# EAGLE board TC board (EAGLE 6.3)
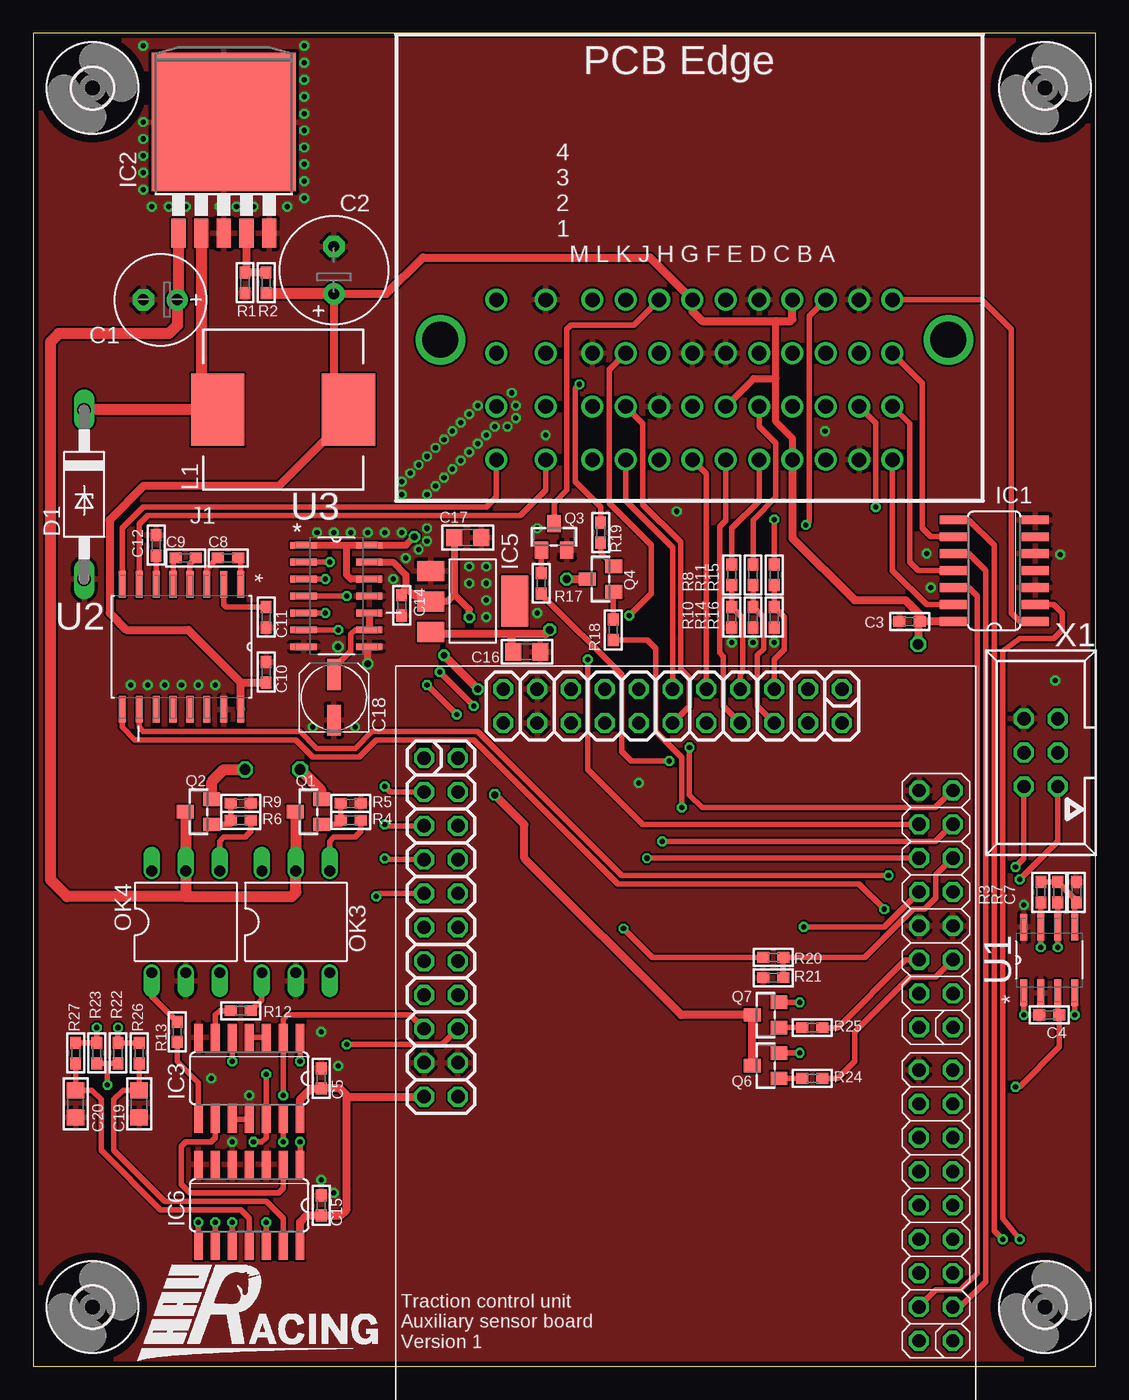
[diagram p0: board, top side]
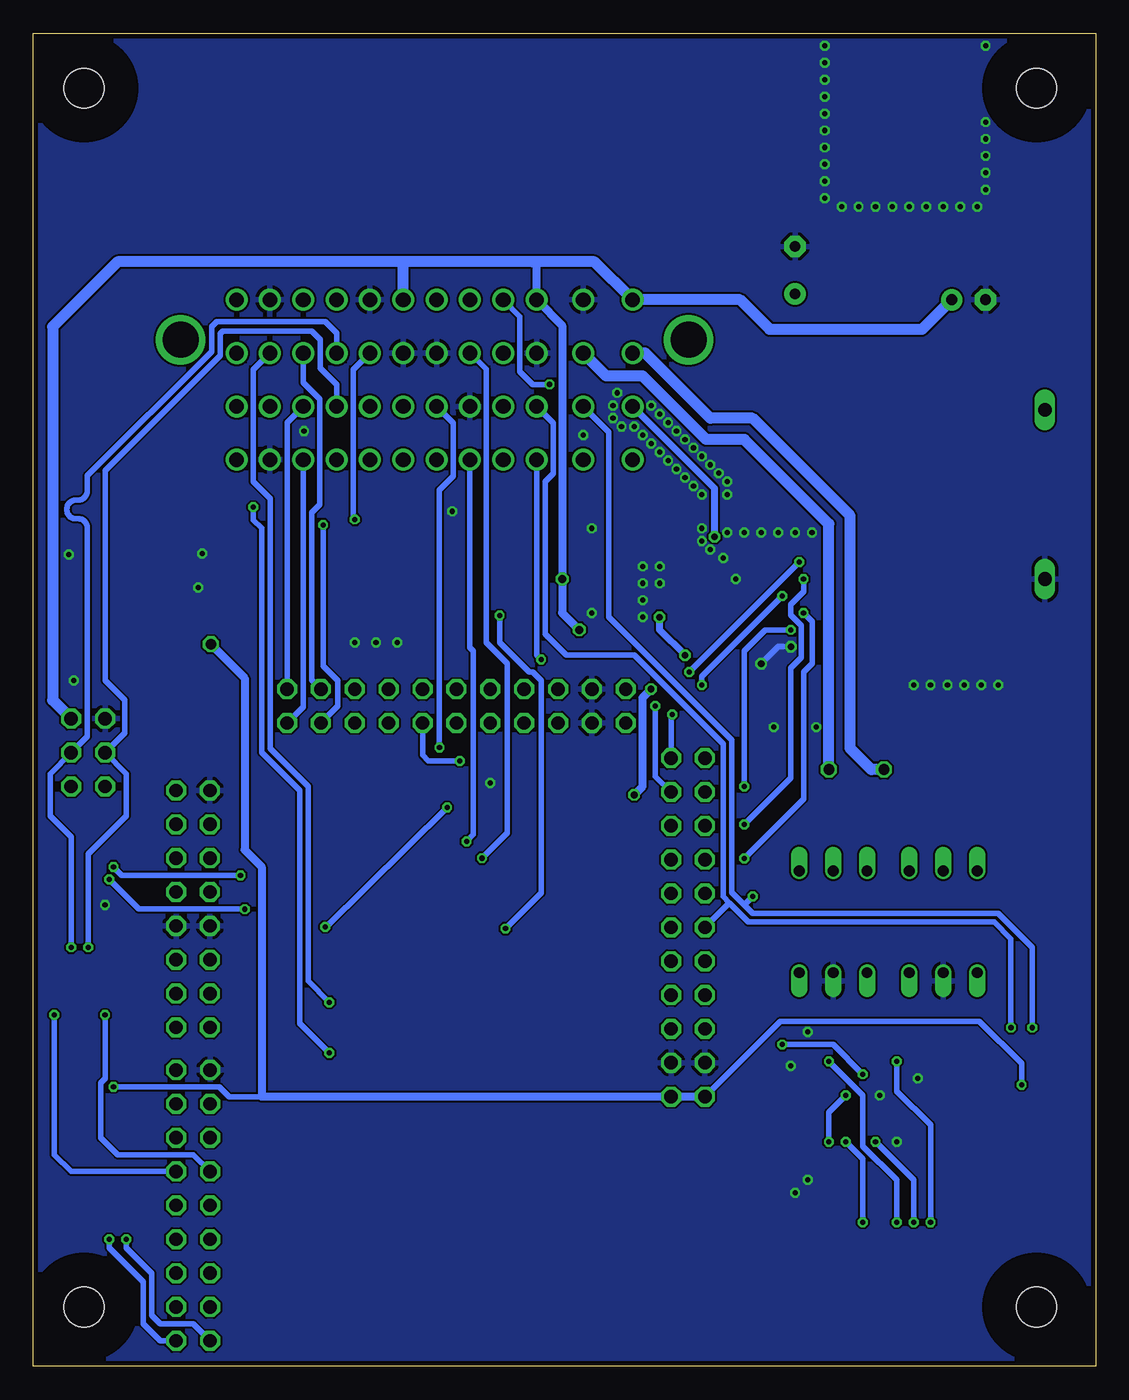
[diagram p1: board, bottom side, seen from below]

Size 79.67 x 100 mm. Coordinates in mm from the lower left corner, seen from the top.
Outline: 0,0 79.67,0 79.67,100 0,100 0,0
Copper layers (1*16): Top 0.0356mm / dielectric 1.5011mm / Bottom 0.0356mm
Design rules "LaenPCBOrder": minimum track width 6mil, minimum drill 13mil, track to track 6mil, track to pad 6mil, pad to pad 6mil, via to via 6mil, smd to smd 6mil, copper to edge 15mil, drill to drill 6mil, minimum pad ring 7mil, minimum via ring 7mil, stop-mask expansion 3mil, vias tented up to drill 0mil, thermal gap 10mil

## Footprints (pad centres in the part's own frame; a part is rotated, then mirrored left to right if it is on the bottom)
E2,5-7 = drill 0.813 pad 1.6: + -1.27,0 | drill 0.813 pad 1.6 octagon: - 1.27,0
E3,5-8 = drill 0.813 pad 1.6: + -1.778,0 | drill 0.813 pad 1.6 octagon: - 1.778,0
_0603 = smd 0.9 x 0.8: 1 -0.762,0; 2 0.762,0
_0805 = smd 1.2 x 1.3: 1 -1.016,0; 2 1.016,0
UD-5X5,8_NICHICON = smd 2.3 x 1: + 1.725,0; - -1.7,0
F126Z12 = drill 1.016 long: A 6.35,0; C -6.35,0
3,0 = hole 3: 0,0
SO14 = smd 0.66 x 2.032: 1 -3.81,-3.073; 2 -2.54,-3.073; 3 -1.27,-3.073; 4 0,-3.073; 5 1.27,-3.073; 6 2.54,-3.073; 7 3.81,-3.073; 8 3.81,3.073; 9 2.54,3.073; 10 1.27,3.073; 11 0,3.073; 12 -1.27,3.073; 13 -2.54,3.073; 14 -3.81,3.073
TO263-5 = smd 1.067 x 2.159: 1 -3.404,-5.791; 2 -1.702,-5.791; 3 0,-5.791; 4 1.702,-5.791; 5 3.404,-5.791 | smd 10.8 x 10.41: 6 0,2.54
SOT223 = smd 1.499 x 2.007: 1 -2.261,-3.15; 2 0.025,-3.15; 3 2.311,-3.15 | smd 3.81 x 2.007: 4 0,3.15
AUTOCONNECTOR = drill 1.1: A1 15.22,-6.92; A2 15.22,-2.92; A3 15.22,1.08; A4 15.22,5.08; B1 12.72,-6.92; B2 12.72,-2.92; B3 12.72,1.08; B4 12.72,5.08; C1 10.22,-6.92; C2 10.22,-2.92; C3 10.22,1.08; C4 10.22,5.08; D1 7.72,-6.92; D2 7.72,-2.92; D3 7.72,1.08; D4 7.72,5.08; E1 5.22,-6.92; E2 5.22,-2.92; E3 5.22,1.08; E4 5.22,5.08; F1 2.72,-6.92; F2 2.72,-2.92; F3 2.72,1.08; F4 2.72,5.08; G1 0.22,-6.92; G2 0.22,-2.92; G3 0.22,1.08; G4 0.22,5.08; H1 -2.28,-6.92; H2 -2.28,-2.92; H3 -2.28,1.08; H4 -2.28,5.08; J1 -4.78,-6.92; J2 -4.78,-2.92; J3 -4.78,1.08; J4 -4.78,5.08; K1 -7.28,-6.92; K2 -7.28,-2.92; K3 -7.28,1.08; K4 -7.28,5.08; L1 -10.78,-6.92; L2 -10.78,-2.92; L3 -10.78,1.08; L4 -10.78,5.08; M1 -14.48,-6.92; M2 -14.48,-2.92; M3 -14.48,1.08; M4 -14.48,5.08 | drill 2.7: SHIELD1 19.42,2.08; SHIELD2 -18.68,2.08
CDRH125 = smd 5.4 x 4: 1 0,4.9; 2 0,-4.9
DIL06 = drill 0.813 offset: 1 -2.54,-3.81; 2 0,-3.81; 3 2.54,-3.81; 4 2.54,3.81; 5 0,3.81; 6 -2.54,3.81
SOT23-WIDE = smd 1 x 1.27: 1 -0.95,-1; 2 0.95,-1; 3 0,1
SOIC127P600X175-8N = smd 1.981 x 0.533: 1 -2.464,1.905; 2 -2.464,0.635; 3 -2.464,-0.635; 4 -2.464,-1.905; 5 2.464,-1.905; 6 2.464,-0.635; 7 2.464,0.635; 8 2.464,1.905
SOIC127P1032X265-16N = smd 1.981 x 0.533: 1 -4.699,4.445; 2 -4.699,3.175; 3 -4.699,1.905; 4 -4.699,0.635; 5 -4.699,-0.635; 6 -4.699,-1.905; 7 -4.699,-3.175; 8 -4.699,-4.445; 9 4.699,-4.445; 10 4.699,-3.175; 11 4.699,-1.905; 12 4.699,-0.635; 13 4.699,0.635; 14 4.699,1.905; 15 4.699,3.175; 16 4.699,4.445
SOIC127P600X175-14N = smd 1.981 x 0.508: 1 -2.464,3.81; 2 -2.464,2.54; 3 -2.464,1.27; 4 -2.464,0; 5 -2.464,-1.27; 6 -2.464,-2.54; 7 -2.464,-3.81; 8 2.464,-3.81; 9 2.464,-2.54; 10 2.464,-1.27; 11 2.464,0; 12 2.464,1.27; 13 2.464,2.54; 14 2.464,3.81
CPU-BOARD-JP1 = drill 1 octagon: P$1 1.27,-12.7; P$2 -1.27,-12.7; P$3 1.27,-10.16; P$4 -1.27,-10.16; P$5 1.27,-7.62; P$6 -1.27,-7.62; P$7 1.27,-5.08; P$8 -1.27,-5.08; P$9 1.27,-2.54; P$10 -1.27,-2.54; P$11 1.27,0; P$12 -1.27,0; P$13 1.27,2.54; P$14 -1.27,2.54; P$15 1.27,5.08; P$16 -1.27,5.08; P$17 1.27,7.62; P$18 -1.27,7.62; P$19 1.27,10.16; P$20 -1.27,10.16; P$21 1.27,12.7; P$22 -1.27,12.7; P$23 -3.905,18.637; P$24 -3.905,16.097; P$25 -6.445,18.637; P$26 -6.445,16.097; P$27 -8.985,18.637; P$28 -8.985,16.097; P$29 -11.525,18.637; P$30 -11.525,16.097; P$31 -14.065,18.637; P$32 -14.065,16.097; P$33 -16.605,18.637; P$34 -16.605,16.097; P$35 -19.145,18.637; P$36 -19.145,16.097; P$37 -21.685,18.637; P$38 -21.685,16.097; P$39 -24.225,18.637; P$40 -24.225,16.097; P$41 -26.765,18.637; P$42 -26.765,16.097; P$43 -29.305,18.637; P$44 -29.305,16.097; P$45 -47.625,-21.018; P$46 -47.625,-18.479; P$47 -45.085,-21.018; P$48 -45.085,-18.479; P$49 -42.545,-21.018; P$50 -42.545,-18.479; P$51 -40.005,-21.018; P$52 -40.005,-18.479; P$53 -37.465,-21.018; P$54 -37.465,-18.479; P$55 -34.925,-21.018; P$56 -34.925,-18.479; P$57 -32.385,-21.018; P$58 -32.385,-18.479; P$59 -29.845,-21.018; P$60 -29.845,-18.479; P$61 -27.305,-21.018; P$62 -27.305,-18.479; P$63 -24.115,-21.024; P$64 -24.115,-18.484; P$65 -21.575,-21.024; P$66 -21.575,-18.484; P$67 -19.035,-21.024; P$68 -19.035,-18.484; P$69 -16.495,-21.024; P$70 -16.495,-18.484; P$71 -13.955,-21.024; P$72 -13.955,-18.484; P$73 -11.415,-21.024; P$74 -11.415,-18.484; P$75 -8.875,-21.024; P$76 -8.875,-18.484; P$77 -6.335,-21.024; P$78 -6.335,-18.484
057-006-1 = drill 1 octagon: 1 -2.54,-1.27; 2 -2.54,1.27; 3 0,-1.27; 4 0,1.27; 5 2.54,-1.27; 6 2.54,1.27

## Placement (x,y rotation side)
C1  100u  [E2,5-7]  9.52,80.01 180 top
C2  220uf  [E3,5-8]  22.54,82.23 90 top
C3  100n  [_0603]  65.72,55.88 180 top
C4  100n  [_0603]  76.2,26.35 180 top
C5  100n  [_0603]  21.59,21.59 90 top
C7  4n7  [_0603]  78.23,35.56 90 top
C8  100n  [_0603]  14.6,60.64 180 top
C9  100n  [_0603]  11.43,60.64 180 top
C10  100n  [_0603]  17.46,52.07 270 top
C11  100n  [_0603]  17.46,56.2 270 top
C12  100n  [_0603]  9.21,61.59 270 top
C14  100n  [_0603]  27.62,57.09 270 top
C15  100n  [_0603]  21.59,12.07 90 top
C16  10u  [_0805]  37.02,53.59 180 top
C17  22u  [_0805]  32.58,62.17 180 top
C18  33uf pan FC  [UD-5X5,8_NICHICON]  22.54,50.17 90 top
C19  100n  [_0805]  7.94,19.68 90 top
C20  100n  [_0805]  3.17,19.68 90 top
D1  1n5824  [F126Z12]  3.81,65.41 270 top
H1  MOUNT-HOLE3.0  [3,0]  75.88,95.89 0 top
H2  MOUNT-HOLE3.0  [3,0]  4.44,95.89 0 top
H3  MOUNT-HOLE3.0  [3,0]  4.44,4.45 0 top
H4  MOUNT-HOLE3.0  [3,0]  75.88,4.45 0 top
IC1  74HC14D  [SO14]  72.07,59.69 90 top
IC2  lm2575  [TO263-5]  14.29,90.81 0 top
IC3  74AC08D  [SO14]  16.19,21.59 180 top
IC5  REG1117  [SOT223]  32.96,57.4 270 top
IC6  74AC14D  [SO14]  16.19,12.07 180 top
J1  CON1  [AUTOCONNECTOR]  49.21,74.93 0 top
L1  MSS1278-224KLD  [CDRH125]  18.73,71.76 90 top
OK3  4N37  [DIL06]  19.69,33.34 0 top
OK4  4N37  [DIL06]  11.43,33.34 0 top
Q1  [SOT23-WIDE]  20.64,41.59 90 top
Q2  [SOT23-WIDE]  12.38,41.59 90 top
Q3  [SOT23-WIDE]  39.05,62.23 0 top
Q4  [SOT23-WIDE]  42.54,59.06 90 top
Q6  [SOT23-WIDE]  54.93,22.54 90 top
Q7  [SOT23-WIDE]  54.93,26.35 90 top
R1  1k  [_0603]  15.88,81.28 90 top
R2  1k69  [_0603]  17.46,81.28 90 top
R3  60  [_0603]  75.56,35.56 90 top
R4  200  [_0603]  23.81,40.96 0 top
R5  1000  [_0603]  23.81,42.23 0 top
R6  200  [_0603]  15.56,40.96 0 top
R7  60  [_0603]  76.83,35.56 90 top
R8  604  [_0603]  52.39,59.37 90 top
R9  1000  [_0603]  15.56,42.23 0 top
R10  178  [_0603]  52.39,56.2 90 top
R11  604  [_0603]  53.97,59.37 90 top
R12  200  [_0603]  15.56,26.67 180 top
R13  200  [_0603]  10.79,25.08 270 top
R14  178  [_0603]  53.97,56.2 90 top
R15  604  [_0603]  55.56,59.37 90 top
R16  178  [_0603]  55.56,56.2 90 top
R17  500  [_0603]  38.1,58.74 270 top
R18  500  [_0603]  43.5,55.25 270 top
R19  100k  [_0603]  42.54,62.55 90 top
R20  178  [_0603]  55.5,29.15 0 top
R21  604  [_0603]  55.5,30.67 180 top
R22  500  [_0603]  6.35,23.5 270 top
R23  500  [_0603]  4.76,23.5 270 top
R24  500  [_0603]  58.42,21.59 0 top
R25  500  [_0603]  58.42,25.4 0 top
R26  500  [_0603]  7.94,23.5 270 top
R27  500  [_0603]  3.17,23.5 270 top
U1  MAX13052ESA+  [SOIC127P600X175-8N]  76.2,30.48 90 top
U2  MAX232AEWE+  [SOIC127P1032X265-16N]  11.11,53.98 270 top
U3  MAX531AESD+  [SOIC127P600X175-14N]  22.73,57.79 0 top
U$1  CPU-BOARD  [CPU-BOARD-JP1]  47.94,49.53 90 top
X1  057-006-1  [057-006-1]  75.56,46.04 90 top

## Library data of the parts
C1 C2 C18 = rcl
C3-C5 C7-C12 C14-C17 C19 C20 Q1-Q4 Q6 Q7 R1-R27 = microbuilder
D1 = diode
H1-H4 = holes
IC1 IC3 IC6 = 74xx-eu
IC2 = linear
IC5 = burr-brown; MPN: REG1117; OC_FARNELL: 1097566; OC_NEWARK: 14P6981
J1 U$1 = unicorn_v2
L1 = SparkFun-Passives
OK3 OK4 = optocoupler; MF: FAIRCHILD SEMICONDUCTOR; MPN: 4N37; OC_FARNELL: 1612456; OC_NEWARK: 72K9948
U1 = Maxim_By_element14_Batch_1; MPN: MAX13052ESA+; OC_FARNELL: 1600112; OC_NEWARK: 99K2875; PACKAGE: SOIC-8; SUPPLIER: Maxim
U2 = Maxim_By_element14_Batch_1; MPN: MAX232AEWE+; OC_FARNELL: 9724400; OC_NEWARK: 67K4435; PACKAGE: SOIC-16; SUPPLIER: Maxim
U3 = Maxim_By_element14_Batch_1; MPN: MAX531AESD+; OC_FARNELL: -; OC_NEWARK: 23K6158; PACKAGE: SOIC-14; SUPPLIER: Maxim
X1 = con-panduit; OC_FARNELL: unknown; OC_NEWARK: unknown

## Nets
3.3V: C2.+ C3.1 C4.1 C5.1 C10.2 C15.1 IC1.14 IC3.14 IC6.14 J1.D1 J1.D4 J1.F2 J1.G4 L1.2 R2.1 R22.2 R23.2 U1.3 U2.16 U$1.P$43 U$1.P$44
5.0V: C14.1 C17.2 IC5.2 Q6.3 Q7.3 U3.13
12V: C1.+ C16.2 IC2.1 IC5.3 J1.F4 J1.K4 J1.M4 OK3.5 OK4.5 Q1.3 Q2.3 Q4.3 X1.5
BITE: J1.E3 R15.2
BITEO: R15.1 R16.2 U$1.P$5
BRAKE-POT: J1.F1 U$1.P$8
BRAKEP: J1.K1 U$1.P$76
CAN_RX: U1.4 U$1.P$55
CAN_TX: U1.1 U$1.P$56
CANH: J1.D3 R7.1 U1.6 X1.3
CANL: J1.D2 R3.1 U1.7 X1.4
CLUTCH-POT: J1.G1 U$1.P$9
COMRX: U2.9 X1.1
COMTX: U2.10 X1.2
DACCLR: U3.3 U$1.P$27
DACCS: U3.5 U$1.P$29
DIRA: IC3.2 IC6.1 U$1.P$39
DIRAO: J1.L3 Q1.2
DIRASENSE: J1.L2 R23.1 R27.1 U$1.P$31
DIRB: IC3.12 IC6.9 U$1.P$40
DIRBO: J1.M3 Q2.2
DIRBSENSE: J1.K2 R22.1 R26.1 U$1.P$33
ECU1: J1.B2 Q6.2
ECU1L: R24.2 U$1.P$67
ECU2: J1.B3 Q7.2
ECU2L: R25.2 U$1.P$68
FUEL-RECIEVE: J1.J3 R21.2
FUEL-RECIEVEI: R20.2 R21.1 U$1.P$73
FUEL-SEND: R18.2 U$1.P$72
FUEL-SENDO: Q4.2 R19.1
GND: C1.- C2.- C3.2 C4.2 C5.2 C7.2 C10.1 C11.2 C12.1 C14.2 C15.2 C16.1 C17.1 C18.- C19.1 C20.1 D1.A IC1.3 IC1.5 IC1.7 IC2.3 IC2.5 IC2.6 IC3.7 IC5.1 IC6.3 IC6.5 IC6.7 J1.B1 J1.B4 J1.E4 J1.F3 J1.G3 J1.H2 J1.K3 J1.L4 OK3.2 OK4.2 Q3.2 R1.1 R5.2 R9.2 R10.1 R14.1 R16.1 R20.1 U1.2 U1.8 U2.15 U3.7 U3.8 U3.11 U$1.P$19 U$1.P$20 U$1.P$41 U$1.P$42 U$1.P$62 U$1.P$69 U$1.P$70 U$1.P$78 X1.6
GSENS: J1.E1 R8.2
GSENSO: R8.1 R10.2 U$1.P$7
IGNCUT: R17.2 U$1.P$10
IGNCUTO: J1.H4 Q3.3
MISO: U3.6 U$1.P$25
MOSI: U3.2 U$1.P$26
N$1: IC2.4 R1.2 R2.2
N$2: D1.C IC2.2 L1.1
N$3: IC1.9 J1.A3
N$4: IC1.13 J1.A1
N$5: IC1.1 J1.A4
N$6: IC1.11 J1.A2
N$7: OK3.4 R4.2
N$8: Q1.1 R4.1 R5.1
N$9: OK4.4 R6.2
N$10: Q2.1 R6.1 R9.1
N$11: IC3.8 R13.2
N$12: C7.1 R3.2 R7.2 U1.5
N$13: C12.2 U2.6
N$14: C9.1 U2.4
N$15: IC3.9 IC6.2
N$16: IC3.5 IC6.8
N$17: OK4.1 R13.1
N$18: OK3.1 R12.1
N$19: IC3.6 R12.2
N$20: C9.2 U2.5
N$21: C8.2 U2.3
N$22: C8.1 U2.1
N$23: C11.1 U2.2
N$24: Q3.1 R17.1
N$25: J1.J4 R19.2
N$26: Q4.1 R18.1
N$29: IC3.3 IC3.4
N$30: IC3.10 IC3.11
N$31: IC3.13 IC6.12
N$32: IC3.1 IC6.10
N$33: C20.2 IC6.11 R27.2
N$34: Q6.1 R24.1
N$35: Q7.1 R25.1
N$36: C19.2 IC6.13 R26.2
NEUTRAL: J1.J1 U$1.P$11
OILP: J1.J2 U$1.P$12
REF: C18.+ U3.9 U3.10
RPM1: IC1.2 U$1.P$45
RPM2: IC1.8 U$1.P$46
RPM3: IC1.10 U$1.P$47
RPM4: IC1.12 U$1.P$48
RS232RX: J1.M1 U2.8
RS232TX: J1.L1 U2.7
SCK: U3.4 U$1.P$24
SPEED: J1.G2 U$1.P$77
TRAVEL1: J1.C2 U$1.P$1
TRAVEL2: J1.C1 U$1.P$2
TRAVEL3: J1.C3 U$1.P$3
TRAVEL4: J1.C4 U$1.P$4
VOUT: J1.M2 U3.1 U3.12 U3.14
VTEMP: J1.H1 U$1.P$75
VTEMP2: J1.H3 U$1.P$74
YAW: J1.E2 R11.2
YAWO: R11.1 R14.2 U$1.P$6

## Tracks (layer width: path | path; a pad name or v marks a point on that pad's centre or on a via)
3.3V  (via drill 0.38, 0.8)
  Top 0.406: C3.1 66.36,55.75 | U1.3 76.83,26.48 C4.1 76.96,23.94 73.98,20.96 v73.66,20.96 | 56.93,78.52 56.83,78.42 56.93,78.42 | R23.2 R22.2 5.56,22.73 v5.56,21.11
  Top 0.508: 55.69,74.1 55.69,70.87 56.93,69.62 J1.D1 | 55.69,74.1 55.69,78.42 | J1.F2 54.03,74.1 55.69,74.1
  Top 0.61: IC1.14 C3.1 66.48,56.39 65.41,57.47 61.59,57.47 56.93,62.13 J1.D1 | 66.36,55.75 v66.36,54.17 | 15.56,51.31 C10.2 | U2.16 15.56,51.31 | 56.83,78.42 55.69,78.42 50.16,78.42 49.43,79.15 J1.G4 46.26,83.18 29.21,83.18 26.48,80.45 C2.+ 22.54,72.84 L1.2 22.22,70.35 22.22,69.85 18.41,66.04 8.25,66.04 5.71,63.5 5.71,56.51 6.98,55.25 11.62,55.25 15.56,51.31 | 56.93,78.52 J1.D4 | IC6.14 20,10.8 20.51,11.3 C15.1 23.05,11.3 23.49,11.75 23.49,20.32 | 23.49,20.32 22.99,20.83 C5.1 20.83,20.83 20,20 IC3.14 | 23.49,20.32 23.59,20.22 U$1.P$43
  Top 0.813: C2.+ 17.53,80.45 R2.1
  Bottom 0.406: 62.55,20.22 64.99,20.22 65.72,20.96 v73.66,20.96 | U$1.P$43 23.65,25.88 8.73,25.88 5.56,22.7 v5.56,21.11
  Bottom 0.61: U$1.P$43 U$1.P$44 62.55,20.22 62.55,37.46 63.82,38.74 63.82,51.63 v66.36,54.17
5.0V  (via drill 0.5)
  Top 0.406: C14.1 27.62,58.1 27.94,58.42
  Top 0.508: U3.13 26.99,60.32 27.94,59.37 27.94,58.42 28.57,57.79 29.4,57.79 IC5.2 31.03,57.38 31.56,57.91 | C17.2 31.56,57.91 | v32.7,56.2 32.7,56.77 31.56,57.91
  Top 0.61: Q6.3 Q7.3 48.58,26.35 36.83,38.1 36.83,40.64 v34.61,42.86 | v33.34,50.8 v30.8,53.34
  Bottom 0.508: v30.8,53.34 32.7,55.25 v32.7,56.2
  Bottom 0.61: v34.61,42.86 33.97,43.5 33.97,50.17 v33.34,50.8
12V  (via drill 0.6)
  Top 0.152: C1.+ 10.88,80.1
  Top 0.61: v40,59.06 Q4.3 | v38.73,55.25 38.42,54.93 35.88,54.93 | 35.88,54.93 29.81,54.93 IC5.3 | C16.2 35.88,53.59 35.88,54.93
  Top 0.813: 11.43,35.24 19.37,35.24 19.69,35.56 OK3.5 19.69,41.54 Q1.3 | 11.43,35.24 OK4.5 11.43,41.54 Q2.3 | IC2.1 10.88,80.1 | C1.+ 10.79,78.1 10.16,77.47 1.91,77.47 1.27,76.84 1.27,36.51 2.54,35.24 11.43,35.24
  Bottom 0.61: 42.23,82.87 41.93,82.57 J1.K4 40,78.08 v40,59.06 40,56.51 v38.73,55.25
  Bottom 0.813: 52.07,82.87 73.34,82.87 78.23,77.98 78.23,49.97 X1.5 | J1.F4 51.93,82.73 52.07,82.87 | 52.07,82.87 42.23,82.87 37.59,82.87 J1.M4 26.67,80.01 24.45,77.79 13.02,77.79 C1.+
BITE  (via drill 0.38)
  Top 0.406: R15.2 v55.56,63.53
  Bottom 0.406: v55.56,63.53 55.69,63.66 55.69,74.75 J1.E3
BITEO
  Top 0.406: R15.1 R16.2 56.32,56.2 56.32,53.78 55.56,53.02 U$1.P$5
BRAKE-POT
  Top 0.406: J1.F1 51.93,63.46 51.47,62.99 51.47,53.53 51.75,53.24 51.75,49.53 U$1.P$8
BRAKEP  (via drill 0.38)
  Top 0.406: U$1.P$76 45.7,40.66 41.59,44.77 v41.59,53.02
  Bottom 0.406: v41.59,53.02 41.93,53.36 J1.K1
CAN_RX  (via drill 0.38)
  Top 0.406: v78.1,26.35 U1.4
  Bottom 0.406: U$1.P$55 76.83,14.6 78.1,15.88 v78.1,26.35
CAN_TX  (via drill 0.38)
  Top 0.406: v74.29,26.35 U1.1
  Bottom 0.406: U$1.P$56 67.69,15.88 73.34,15.88 74.61,17.14 74.61,21.27 74.29,21.59 v74.29,26.35
CANH  (via drill 0.38)
  Top 0.406: R7.1 U1.6 v76.83,31.43
  Bottom 0.406: v76.83,31.43 76.83,39.69 78.42,41.28 78.42,44.45 X1.3 75.63,47.24 75.63,62.91 arc-90 76.3,63.59 76.49,63.59 arc90 77.16,64.26 77.16,64.31 arc90 76.49,64.99 76.3,64.99 arc-90 75.63,65.66 75.63,66.8 66.29,76.14 66.29,77.98 65.91,78.36 57.78,78.36 56.93,77.51 J1.D3
CANL  (via drill 0.38)
  Top 0.406: R3.1 U1.7 v75.56,31.43
  Bottom 0.406: v75.56,31.43 75.56,38.42 72.71,41.28 72.71,44.45 X1.4 72.83,47.5 72.83,49.97 74.29,51.43 74.29,67.18 65.66,75.82 65.66,77.47 65.47,77.66 58.8,77.66 58.17,77.03 58.17,74.87 56.93,73.63 J1.D2
CLUTCH-POT
  Top 0.406: U$1.P$9 50.48,66.96 J1.G1
COMRX  (via drill 0.38)
  Top 0.406: X1.1 76.83,39.37 v73.98,36.51 | v63.82,34.29 61.91,36.2 43.81,36.2 33.02,46.99 25.72,46.99 24.45,45.72 20.95,45.72 19.69,46.99 7.62,46.99 6.67,47.94 U2.9
  Bottom 0.406: v73.98,36.51 71.75,34.29 v63.82,34.29
COMTX  (via drill 0.38)
  Top 0.406: X1.2 74.29,38.1 v73.66,37.46 | v64.13,36.83 44.13,36.83 33.34,47.63 25.4,47.63 24.13,46.35 21.27,46.35 20,47.63 8.25,47.63 7.94,47.94 U2.10
  Bottom 0.406: v73.66,37.46 73.02,36.83 v64.13,36.83
DACCLR  (via drill 0.38)
  Top 0.406: U3.3 v21.91,59.06 | v26.35,40.64 26.45,40.54 U$1.P$27
  Bottom 0.406: v21.91,59.06 21.91,58.1 22.86,57.15 22.86,56.36 22.07,55.56 22.07,53.18 22.86,52.39 22.86,44.13 v26.35,40.64
DACCS  (via drill 0.38)
  Top 0.406: U3.5 v21.91,56.51 | v26.35,38.1 26.45,38 U$1.P$29
  Bottom 0.406: v21.91,56.51 21.27,55.88 21.27,52.7 21.91,52.07 21.91,42.54 v26.35,38.1
DIRA  (via drill 0.38)
  Top 0.406: IC6.1 v20,16.83 | v18.73,20.32 IC3.2 18.73,26.03 19.05,26.35 28.26,26.35 U$1.P$39
  Bottom 0.406: v20,16.83 20,19.05 v18.73,20.32
DIRAO  (via drill 0.8)
  Top 0.813: Q1.2 21.59,42.59 21.59,43.18 v20,44.77
  Bottom 0.813: v20,44.77 20,63.18 26.35,69.53 29.21,69.53 33.97,74.29 36.72,74.29 J1.L3
DIRASENSE  (via drill 0.38)
  Top 0.406: U$1.P$31 25.94,35.46 v25.72,35.24 | v4.76,25.4 R23.1 R27.1
  Bottom 0.406: 26.35,34.61 25.72,33.97 7.3,33.97 4.76,31.43 v4.76,25.4 | 26.35,34.61 27.3,35.56 27.3,46.99 36.51,56.2 36.51,70.09 J1.L2 | v25.72,35.24 26.35,34.61
DIRB  (via drill 0.38)
  Top 0.406: IC6.9 v13.65,10.8 | v16.51,16.83 17.14,16.83 17.46,17.14 IC3.12 v17.46,21.91 | v23.49,24.13 30.67,24.13 U$1.P$40
  Bottom 0.406: v16.51,16.83 13.65,13.97 v13.65,10.8 | v17.46,21.91 19.69,24.13 v23.49,24.13
DIRBO  (via drill 0.8)
  Top 0.813: Q2.2 13.38,43.86 14.29,44.77 v15.88,44.77
  Bottom 0.813: v15.88,44.77 16.83,44.77 18.41,46.35 18.41,63.82 25.72,71.12 28.89,71.12 33.78,76.01 J1.M3
DIRBSENSE  (via drill 0.38)
  Top 0.406: v6.35,25.4 R22.1 R26.1
  Bottom 0.406: 27.46,34.77 26.03,33.34 7.62,33.34 6.35,32.07 v6.35,25.4 | 27.46,34.77 27.94,35.24 27.94,46.67 34.61,53.34 39.69,53.34 41.27,54.93 41.27,66.36 40.67,66.96 40.67,70.75 J1.K2 | U$1.P$33 27.46,34.77
ECU1  (via drill 0.38)
  Top 0.406: Q6.2 v57.47,23.5 | v63.18,64.45 63.18,70.76 J1.B2
  Bottom 0.406: v57.47,23.5 59.69,25.72 59.69,43.18 62.55,46.04 62.55,62.87 63.18,63.5 v63.18,64.45
ECU1L
  Top 0.406: U$1.P$67 67.68,29.21 65.72,29.21 61.59,25.08 61.59,22.86 60.32,21.59 R24.2
ECU2  (via drill 0.38)
  Top 0.406: Q7.2 v57.46,27.3 v57.47,27.31
  Bottom 0.406: v57.47,27.31 59.05,28.89 59.05,43.5 61.91,46.35 61.91,65.09 63.18,66.36 63.18,74.76 J1.B3
ECU2L
  Top 0.406: U$1.P$68 66.41,30.48 65.41,30.48 60.32,25.4 R25.2
FUEL-RECIEVE  (via drill 0.38)
  Top 0.406: J1.J3 43.18,74.76 43.18,64.77 46.35,61.59 46.35,57.98 v44.7,56.32 | v44.26,32.83 46.42,30.67 R21.2
  Bottom 0.406: v44.7,56.32 44.7,54.29 42.48,52.07 42.23,52.07 41.59,51.43 41.59,35.5 v44.26,32.83
FUEL-RECIEVEI
  Top 0.406: U$1.P$73 67.69,36.84 67.69,35.12 66.87,34.29 65.98,34.29 62.36,30.67 R21.1 R20.2
FUEL-SEND  (via drill 0.38)
  Top 0.406: R18.2 46.04,54.48 46.67,53.85 46.67,47.63 48.64,45.66 v48.64,41.91 | v57.78,32.96 63.81,32.96 U$1.P$72
  Bottom 0.406: v48.64,41.91 57.72,32.96 v57.78,32.96
FUEL-SENDO
  Top 0.406: R19.1 42.54,61.01 Q4.2
GND  (via drill 0.38, 0.5)
  Top 0.406: 25.08,53.86 U3.8
  Top 0.508: v25.08,52.7 25.08,53.86
  Bottom 0.406: v22.86,53.98 23.81,53.98 v25.08,52.7
  other vias: 74.29,34.61 7.3,51.12 8.57,51.12 9.84,51.12 11.11,51.12 12.38,51.12 13.65,51.12 55.56,54.29 53.97,54.29 52.39,54.29 48.26,64.14 66.99,60.96 67.31,58.42 59.37,70.17 21.59,25.08 45.4,43.75 77.03,60.9 76.64,51.44 20.95,47.94 24.13,47.94 33.97,56.2 33.97,57.47 33.97,58.74 33.97,60.01 32.7,60.01 32.7,58.74 37.78,56.52 37.78,62.87 38.42,69.85 8.25,93.34 8.25,92.08 8.25,90.81 8.25,89.54 8.25,88.27 8.89,87 10.16,87 11.43,87 12.7,87 13.97,87 15.24,87 16.51,87 17.78,87 19.05,87 20.32,87.63 20.32,88.9 20.32,90.17 20.32,91.44 20.32,92.71 20.32,93.98 20.32,95.25 20.32,96.52 20.32,97.79 20.32,99.06 8.25,99.06 26.99,59.06 21.27,62.55 22.54,62.55 23.81,62.55 25.08,62.55 26.35,62.55 27.62,62.55 28.89,61.28 29.53,61.91 29.53,62.87 27.62,65.41 27.62,66.36 28.26,66.99 28.89,67.63 29.53,68.26 30.16,68.9 30.8,69.53 31.43,70.17 32.07,70.8 32.7,71.44 33.34,72.07 29.53,65.41 30.16,66.04 30.8,66.68 31.43,67.31 32.07,67.95 32.7,68.58 33.34,69.22 33.97,69.85 34.61,70.48 35.56,70.48 36.19,71.12 36.19,72.07 35.88,73.03 27.94,60.64 22.86,22.54 14.92,16.83 16.19,20.32 13.33,21.59 21.59,13.97 22.54,13.02
  pour Bottom: 0,0 79.69,0 79.69,100.33 0,100.33
  pour Top: 0,0 79.69,0 79.69,100.33 0,100.33
GSENS
  Top 0.406: R8.2 52.39,62.87 54.43,64.91 J1.E1
GSENSO
  Top 0.406: R8.1 R10.2 53.21,56.13 53.21,52.13 53.02,51.94 U$1.P$7
IGNCUT  (via drill 0.38)
  Top 0.406: v47.69,45.4 44.83,45.4 44.13,46.1 44.13,51.88 38.1,57.91 R17.2
  Bottom 0.406: U$1.P$10 50.48,45.85 50.04,45.4 v47.69,45.4
IGNCUTO
  Top 0.406: Q3.3 39.05,64.77 40,65.72 40,77.79 40.32,78.1 45.03,78.1 J1.H4
MISO  (via drill 0.38)
  Top 0.406: v26.35,43.5 26.76,43.08 U$1.P$25 | U3.6 v22.86,55.25
  Bottom 0.406: v26.35,43.5 26.35,53.66 24.76,55.25 v22.86,55.25
MOSI  (via drill 0.38)
  Top 0.406: U3.2 v22.22,60.32 | v30.48,52.07 v33.02,49.53
  Bottom 0.406: v22.22,60.32 v30.48,52.07 | U$1.P$26 33.02,44.26 v33.02,49.53
N$1
  Top 0.61: R2.2 R1.2 15.99,82.25 IC2.4
N$2
  Top 0.813: IC2.2 12.59,72.19 13.33,71.44 13.51,71.44 L1.1 D1.C
N$3
  Top 0.406: J1.A3 66.67,73.77 66.67,62.87 67.31,62.23 IC1.9
N$4
  Top 0.406: J1.A1 64.43,59.71 66.99,57.15 IC1.13
N$5
  Top 0.406: IC1.1 73.98,55.88 73.34,56.51 73.34,77.79 71.12,80.01 J1.A4
N$6
  Top 0.406: J1.A2 65.72,70.72 65.72,60.32 66.36,59.69 IC1.11
N$7
  Top 0.406: OK3.4 22.22,39.37 22.54,39.69 24.13,39.69 24.57,40.13 R4.2
N$8
  Top 0.406: R5.1 R4.1 23.05,40.64 Q1.1
N$9
  Top 0.406: OK4.4 13.97,39.37 14.29,39.69 15.88,39.69 16.32,40.13 R6.2
N$10
  Top 0.406: R9.1 R6.1 14.79,40.64 Q2.1
N$11
  Top 0.406: IC3.8 12.38,21.27 10.79,22.86 R13.2
N$12
  Top 0.406: R3.2 R7.2 78.36,34.8 C7.1 78.1,34.67 U1.5
N$13
  Top 0.406: U2.6 C12.2
N$14
  Top 0.406: U2.4 11.75,60.2 C9.1
N$15
  Top 0.406: IC6.2 18.73,13.33 18.41,13.02 11.75,13.02 11.11,13.65 11.11,16.51 11.43,16.83 13.33,16.83 13.65,17.14 IC3.9
N$16  (via drill 0.38)
  Top 0.406: IC6.8 v12.38,10.8 | v14.92,22.86 IC3.5
  Bottom 0.406: v12.38,10.8 12.38,18.1 14.92,20.64 v14.92,22.86
N$17
  Top 0.406: R13.1 8.89,27.75 OK4.1
N$18
  Top 0.406: R12.1 17.14,27.5 OK3.1
N$19
  Top 0.406: IC3.6 13.65,26.35 13.97,26.67 R12.2
N$20
  Top 0.406: U2.5 10.48,60.45 C9.2
N$21
  Top 0.406: U2.3 13.02,59.82 C8.2
N$22
  Top 0.406: C8.1 15.56,60.45 U2.1
N$23
  Top 0.406: C11.1 14.48,56.96 14.29,57.15 U2.2
N$24
  Top 0.406: R17.1 Q3.1
N$25  (via drill 0.38)
  Top 0.406: R19.2 42.54,64.45 40.64,66.36 40.64,73.34 v40.96,73.66
  Bottom 0.406: v40.96,73.66 42.23,73.66 43.18,74.61 43.18,78.76 J1.J4
N$26
  Top 0.406: R18.1 43.5,58.06 Q4.1
N$29
  Top 0.406: IC3.3 IC3.4
N$30
  Top 0.406: IC3.11 IC3.10
N$31  (via drill 0.38)
  Top 0.406: IC6.12 v17.46,10.8 | v18.73,16.83 IC3.13
  Bottom 0.406: v17.46,10.8 17.46,15.56 v18.73,16.83
N$32  (via drill 0.38)
  Top 0.406: IC6.10 v14.92,10.8 | v20,22.86 IC3.1
  Bottom 0.406: v14.92,10.8 14.92,13.97 17.46,16.51 17.46,20.32 v20,22.86
N$33
  Top 0.406: R27.2 C20.2 4.38,20.7 5.08,20 5.08,16.19 9.52,11.75 15.56,11.75 16.19,11.11 IC6.11
N$34
  Top 0.406: R24.1 Q6.1
N$35
  Top 0.406: R25.1 Q7.1
N$36
  Top 0.406: R26.2 C19.2 6.73,20.7 6.03,20 6.03,16.19 9.84,12.38 17.46,12.38 18.73,11.11 IC6.13
NEUTRAL
  Top 0.406: U$1.P$11 47.94,61.44 44.45,64.93 44.45,67.99 J1.J1
OILP
  Top 0.406: U$1.P$12 49.18,49.5 49.18,51.66 48.55,52.29 48.55,61.82 45.72,64.64 45.72,70.72 J1.J2
REF
  Top 0.406: U3.9 24.13,55.25 23.81,54.93 23.81,53.66 22.54,52.39 C18.+
  Top 0.508: U3.10 U3.9
RPM1  (via drill 0.38)
  Top 0.406: IC1.2 76.52,57.15 77.15,56.51 77.15,55.25 76.52,54.61 73.98,54.61 72.71,53.66 72.71,11.11 v73.98,9.53
  Bottom 0.406: U$1.P$45 70.17,1.91 71.44,3.17 71.44,6.35 73.98,8.89 v73.98,9.53
RPM2  (via drill 0.38)
  Top 0.406: IC1.8 70.17,63.5 72.07,61.59 72.07,10.16 v72.71,9.53
  Bottom 0.406: U$1.P$46 67.69,3.17 70.17,3.17 70.8,3.81 70.8,6.98 72.71,8.89 v72.71,9.53
RPM3
  Top 0.406: IC1.10 70.17,60.96 71.44,59.69 71.44,6.35 69.53,4.44 U$1.P$47
RPM4
  Top 0.406: IC1.12 70.17,58.42 70.8,57.79 70.8,6.98 69.53,5.71 67.69,5.71 U$1.P$48
RS232RX
  Top 0.406: U2.8 6.67,62.87 8.25,64.45 33.97,64.45 34.73,65.21 J1.M1
RS232TX
  Top 0.406: U2.7 7.94,63.18 8.57,63.82 36.51,63.82 38.43,65.74 J1.L1
SCK  (via drill 0.38)
  Top 0.406: U3.4 v23.49,57.79 | v29.53,51.12 v31.75,48.9
  Bottom 0.406: v23.49,57.79 29.53,51.75 v29.53,51.12 | v31.75,48.9 31.84,48.8 U$1.P$24
SPEED  (via drill 0.38)
  Top 0.406: U$1.P$77 68.91,43.2 67.63,41.91 50.16,41.91 49.21,42.86 v49.21,46.42
  Bottom 0.406: J1.G2 48.16,70.74 48.16,66.77 49.21,65.72 v49.21,46.42
TRAVEL1
  Bottom 0.406: U$1.P$1 60.64,70.8 J1.C2
TRAVEL2
  Bottom 0.406: J1.C1 59.43,49.47 U$1.P$2
TRAVEL3
  Bottom 0.406: U$1.P$3 58.8,51.5 58.8,64.04 58.2,64.64 58.2,72.55 59.43,73.78 J1.C3
TRAVEL4  (via drill 0.38)
  Top 0.406: J1.C4 58.2,78.78 58.2,63.37 v57.94,63.12
  Bottom 0.406: v57.94,63.12 57.94,52.55 56.83,51.43 56.83,49.53 U$1.P$4
VOUT  (via drill 0.5)
  Top 0.508: U3.1 23.49,61.59 | 23.49,61.59 U3.14 27.94,61.59 v28.57,62.23 | U3.12 23.81,59.06 23.49,59.37 23.49,61.59
  Bottom 0.508: v28.57,62.23 28.57,65.85 J1.M2
VTEMP  (via drill 0.38)
  Top 0.406: U$1.P$75 68.91,40.66 67.63,39.37 v47.18,39.37
  Bottom 0.406: v47.18,39.37 46.67,39.88 46.67,53.66 46.93,53.92 J1.H1
VTEMP2  (via drill 0.38)
  Top 0.406: U$1.P$74 v46.02,38.12
  Bottom 0.406: v46.02,38.12 44.13,40 44.13,52.7 45.72,54.29 45.72,74.8 J1.H3
YAW
  Top 0.406: R11.2 53.97,63.5 55.69,65.21 55.69,69.25 54.43,70.5 J1.E2
YAWO
  Top 0.406: R11.1 R14.2 54.77,56.17 54.77,53.82 54.29,53.34 54.29,49.53 U$1.P$6

## Text on the board
tSilk: Traction control unit / Auxiliary sensor board / Version 1